# Altium PCB pci_104.PcbDoc (part 2 of 4)
Units mil, origin at the board's own origin, x right, y up, seen from the top; angles counter-clockwise.
Board outline 3775.2 x 3550 mil, 4 copper layers (Top Layer - RF, MidLayer2 - GND, MidLayer3 - POWER, Bottom Layer - Digital), stack 61.756 mil thick; 251 components, 242 nets, 872 pads, 382 vias.
Unrouted connection lines stored in the file: 291.
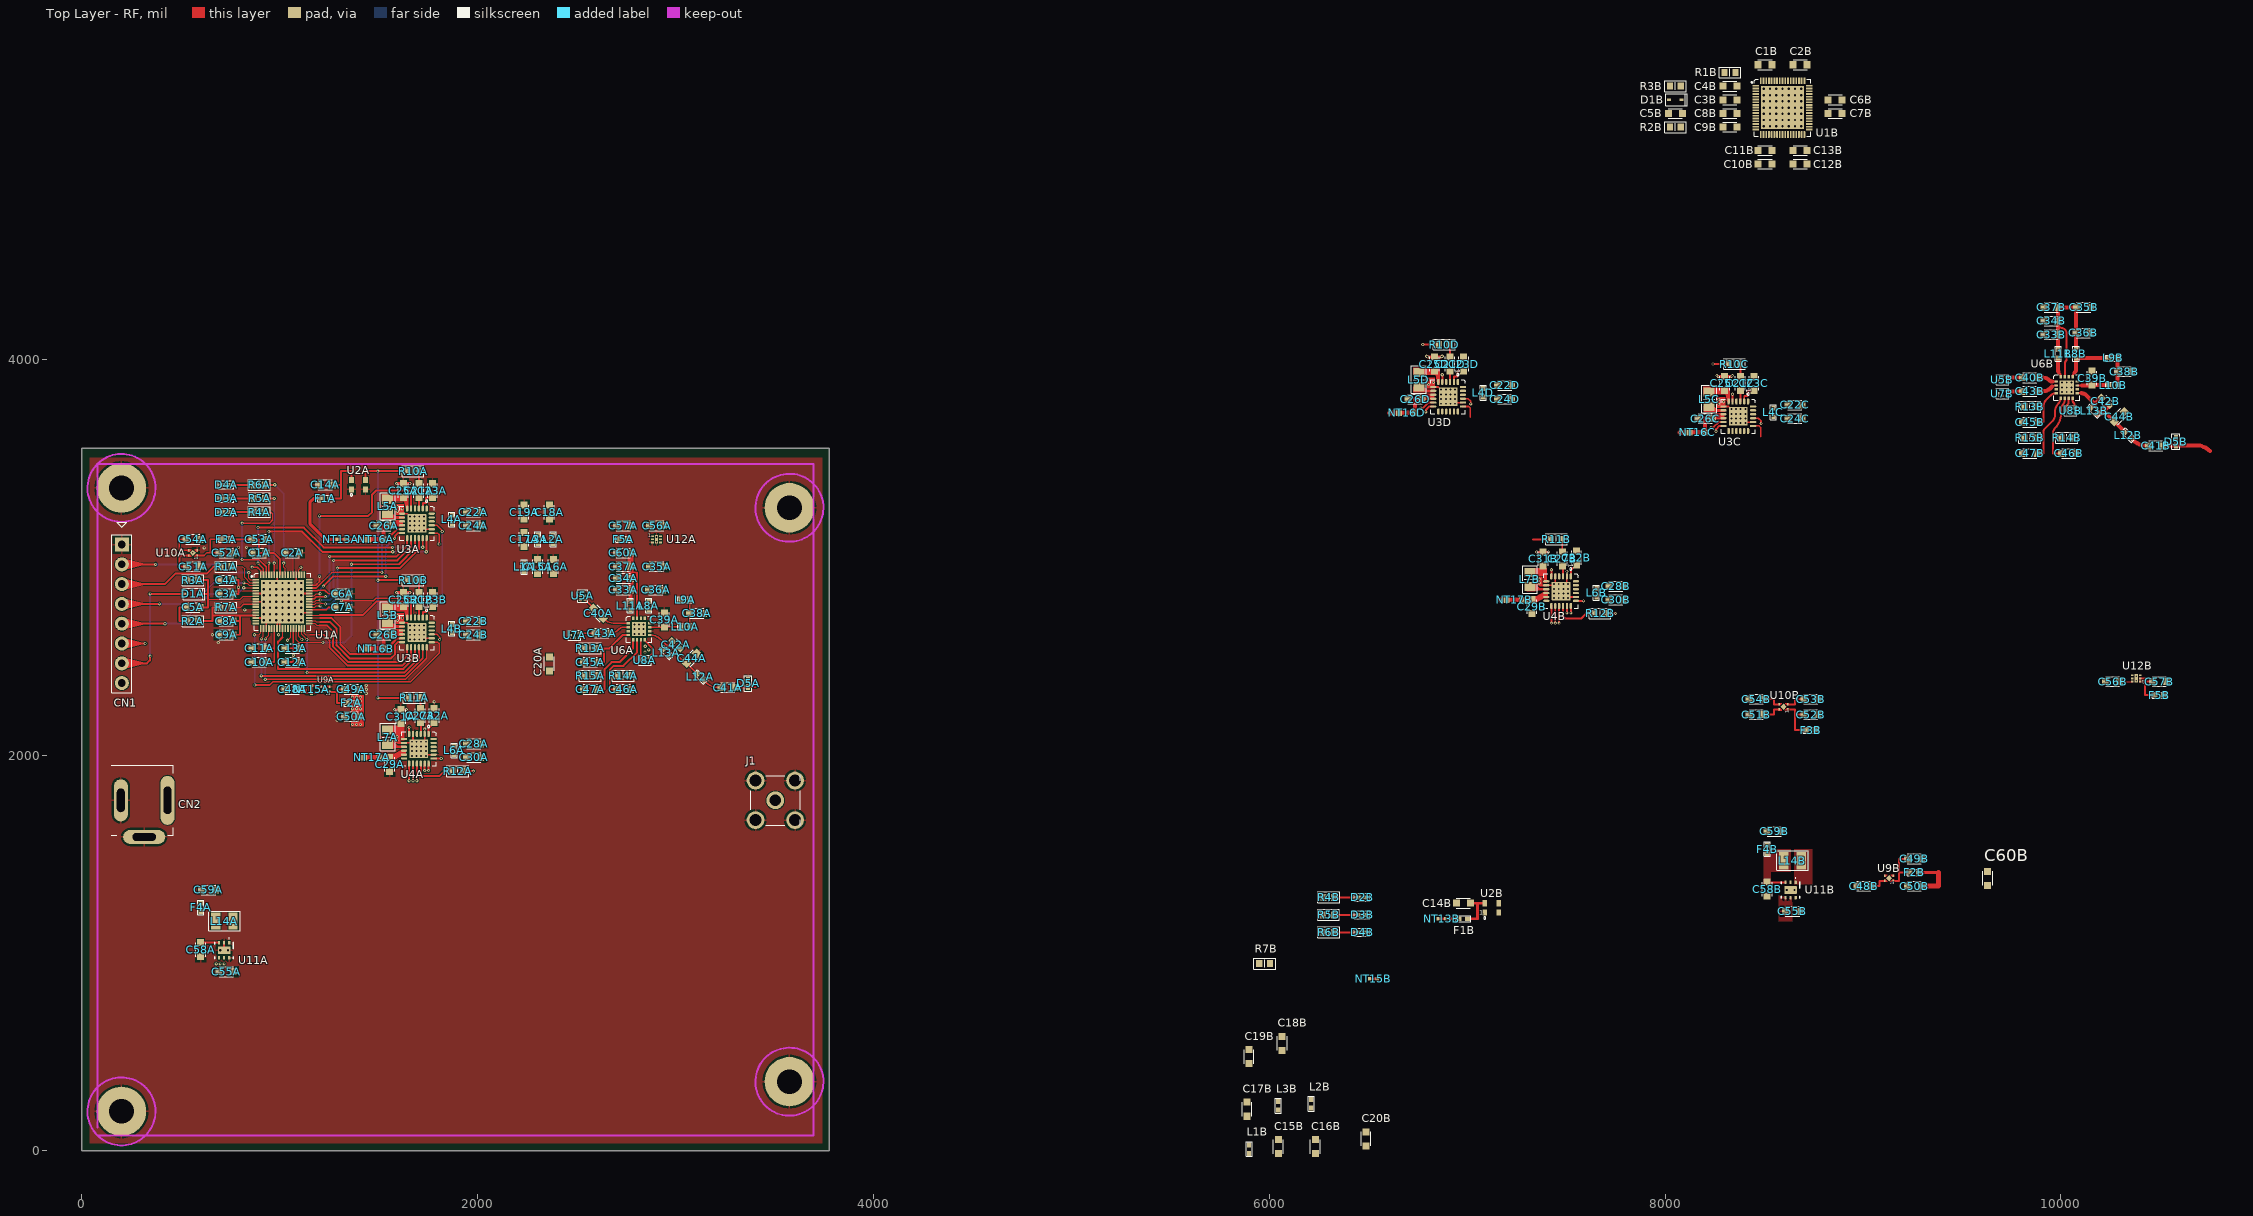
[diagram p0: Top Layer - RF view]

## Via types
v1: diameter 15.75, hole 7.87, Top Layer - RF to Bottom Layer - Digital, tented both sides, 154 vias
v2: diameter 19.68, hole 9.84, Top Layer - RF to Bottom Layer - Digital, tented top, 114 vias
v3: diameter 23.62, hole 11.81, Top Layer - RF to Bottom Layer - Digital, tented top, 102 vias
v4: diameter 15.75, hole 7.87, Top Layer - RF to Bottom Layer - Digital, 8 vias
v5: diameter 15.75, hole 7.87, Top Layer - RF to Bottom Layer - Digital, tented top, 4 vias

## Nets (pads, with @x,y where several pads share a name; then routed paths per layer and width w, separated by ;. In a path a pad name is that pad's centre, name@x,y a point inside that pad or via, vN(x,y) a via of type N, cw(c..) or ccw(c..) an arc to the next point about the centre after c; other vN are vias at no path point) (continued)
CONFIG_OKB: R4B.2 U1B.66
CSDA: C45A.1 R13A.1 U6A.4 | length 294.8
  Top Layer - RF w10: R13A.1@2596.46,2539.37 2637.8,2539.37 ; C45A.1@2604.33,2470.47 2637.8,2470.47 2637.8,2539.37 ; U6A.4@2760.83,2607.08 2733.07,2607.08 2665.35,2539.37 2637.8,2539.37
CSDB: C45B.1 R13B.1 U6B.4 | length 253.4
  Top Layer - RF w10: R13B.1@9870.08,3761.03 9911.42,3761.03 ; C45B.1@9877.95,3682.29 9911.42,3682.29 9911.42,3761.03 ; U6B.4@9975.39,3828.74 ccw(c9975.39,3790.24) 9948.17,3817.46 9925.34,3794.63 ccw(c9958.94,3761.03) 9911.42,3761.03
DCC_SWA: L5A.2 U3A.8
DCC_SWB: L5B.2 U3B.8
DCC_SWC: L5C.2 U3C.8
DCC_SWD: L5D.2 U3D.8